# Altium PCB ATT-L6201.PcbDoc
Units mm, origin at the board's own origin, x right, y up, seen from the top; angles counter-clockwise.
Board outline 108.25 x 95.81 mm, 2 copper layers (Top Layer, Bottom Layer); 114 components, 179 nets, 450 pads, 0 vias.
Unrouted connection lines stored in the file: 267.
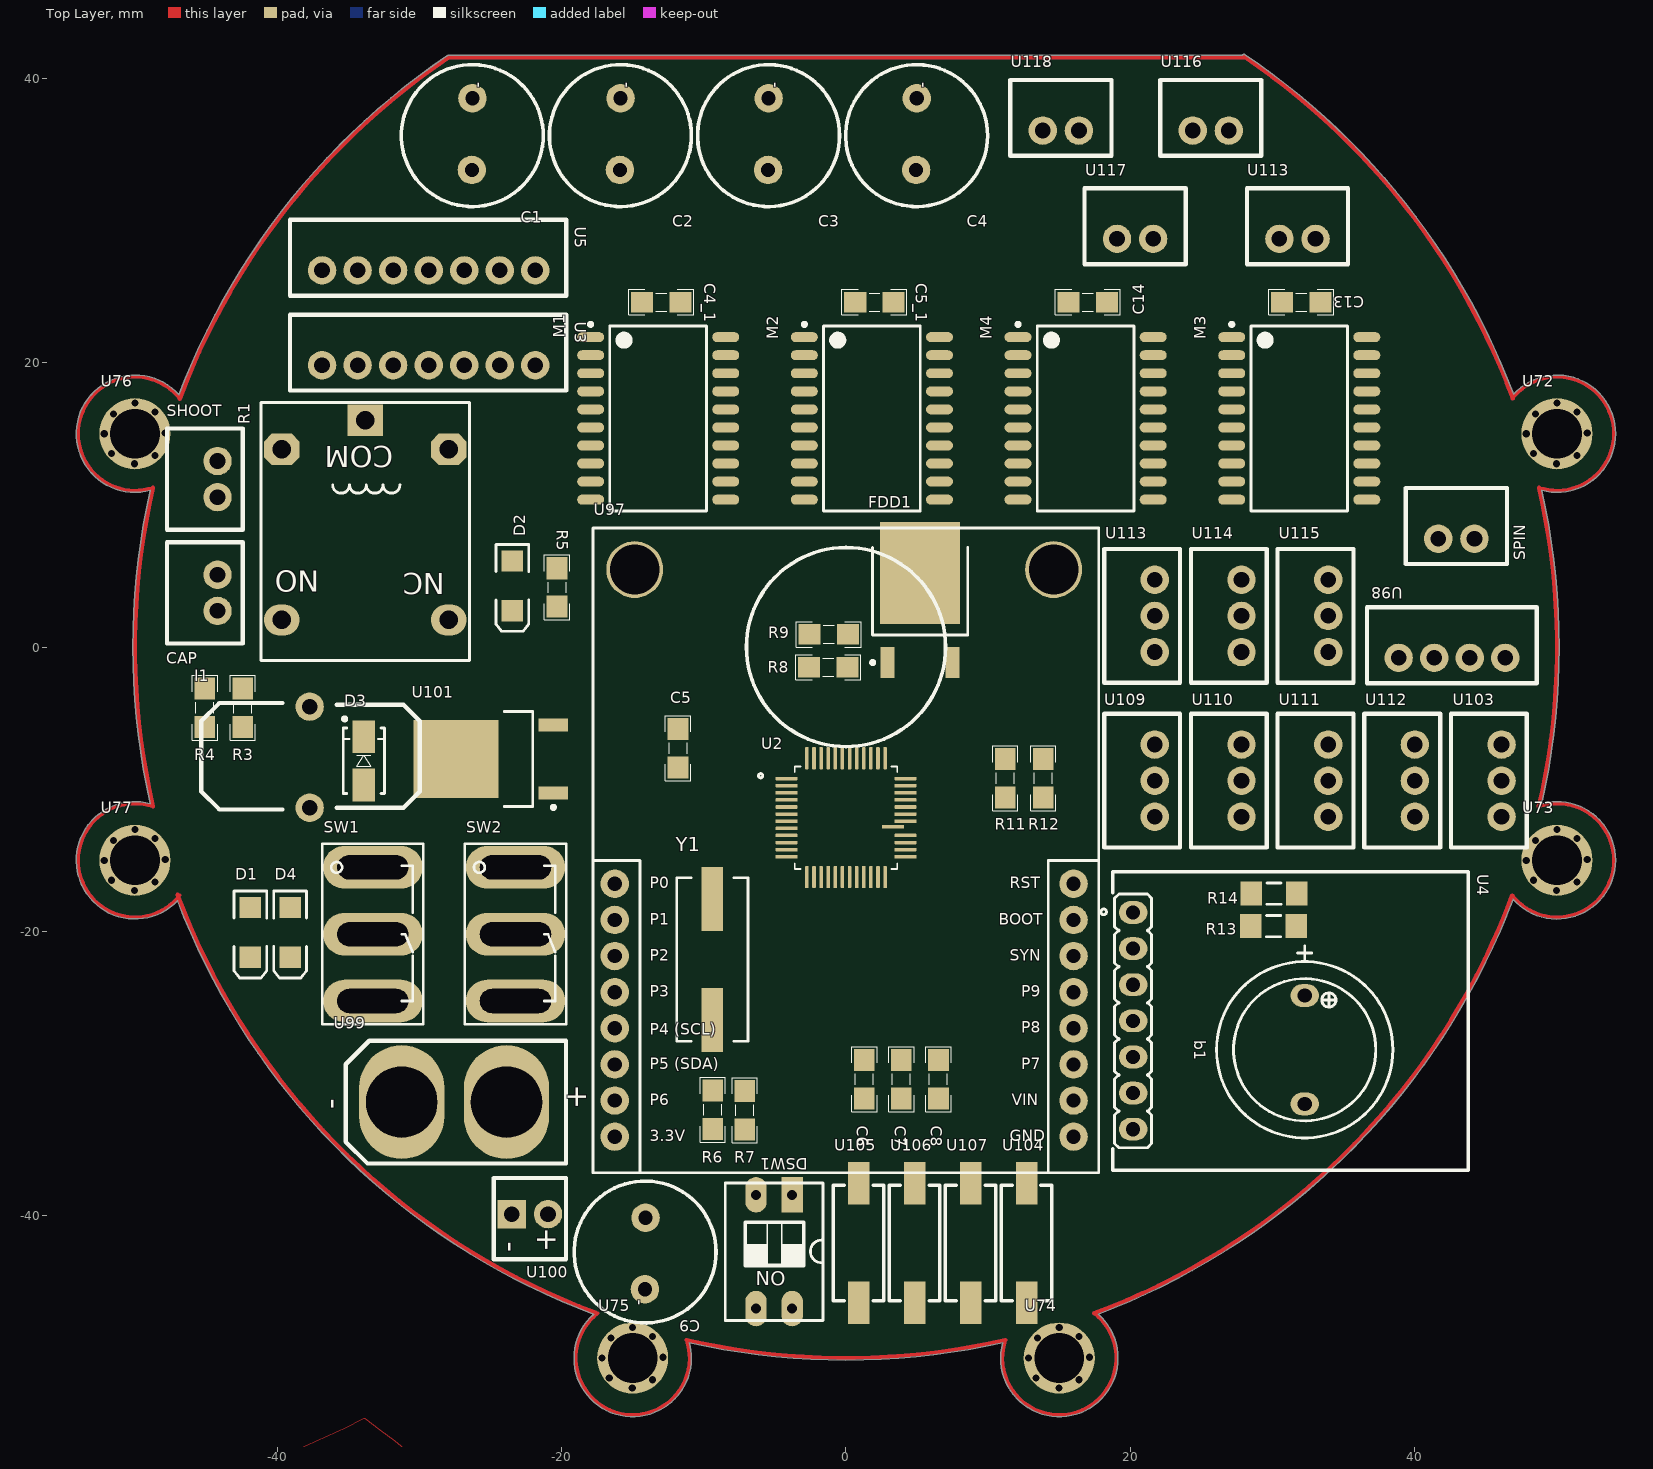
[diagram p0: Top Layer view]
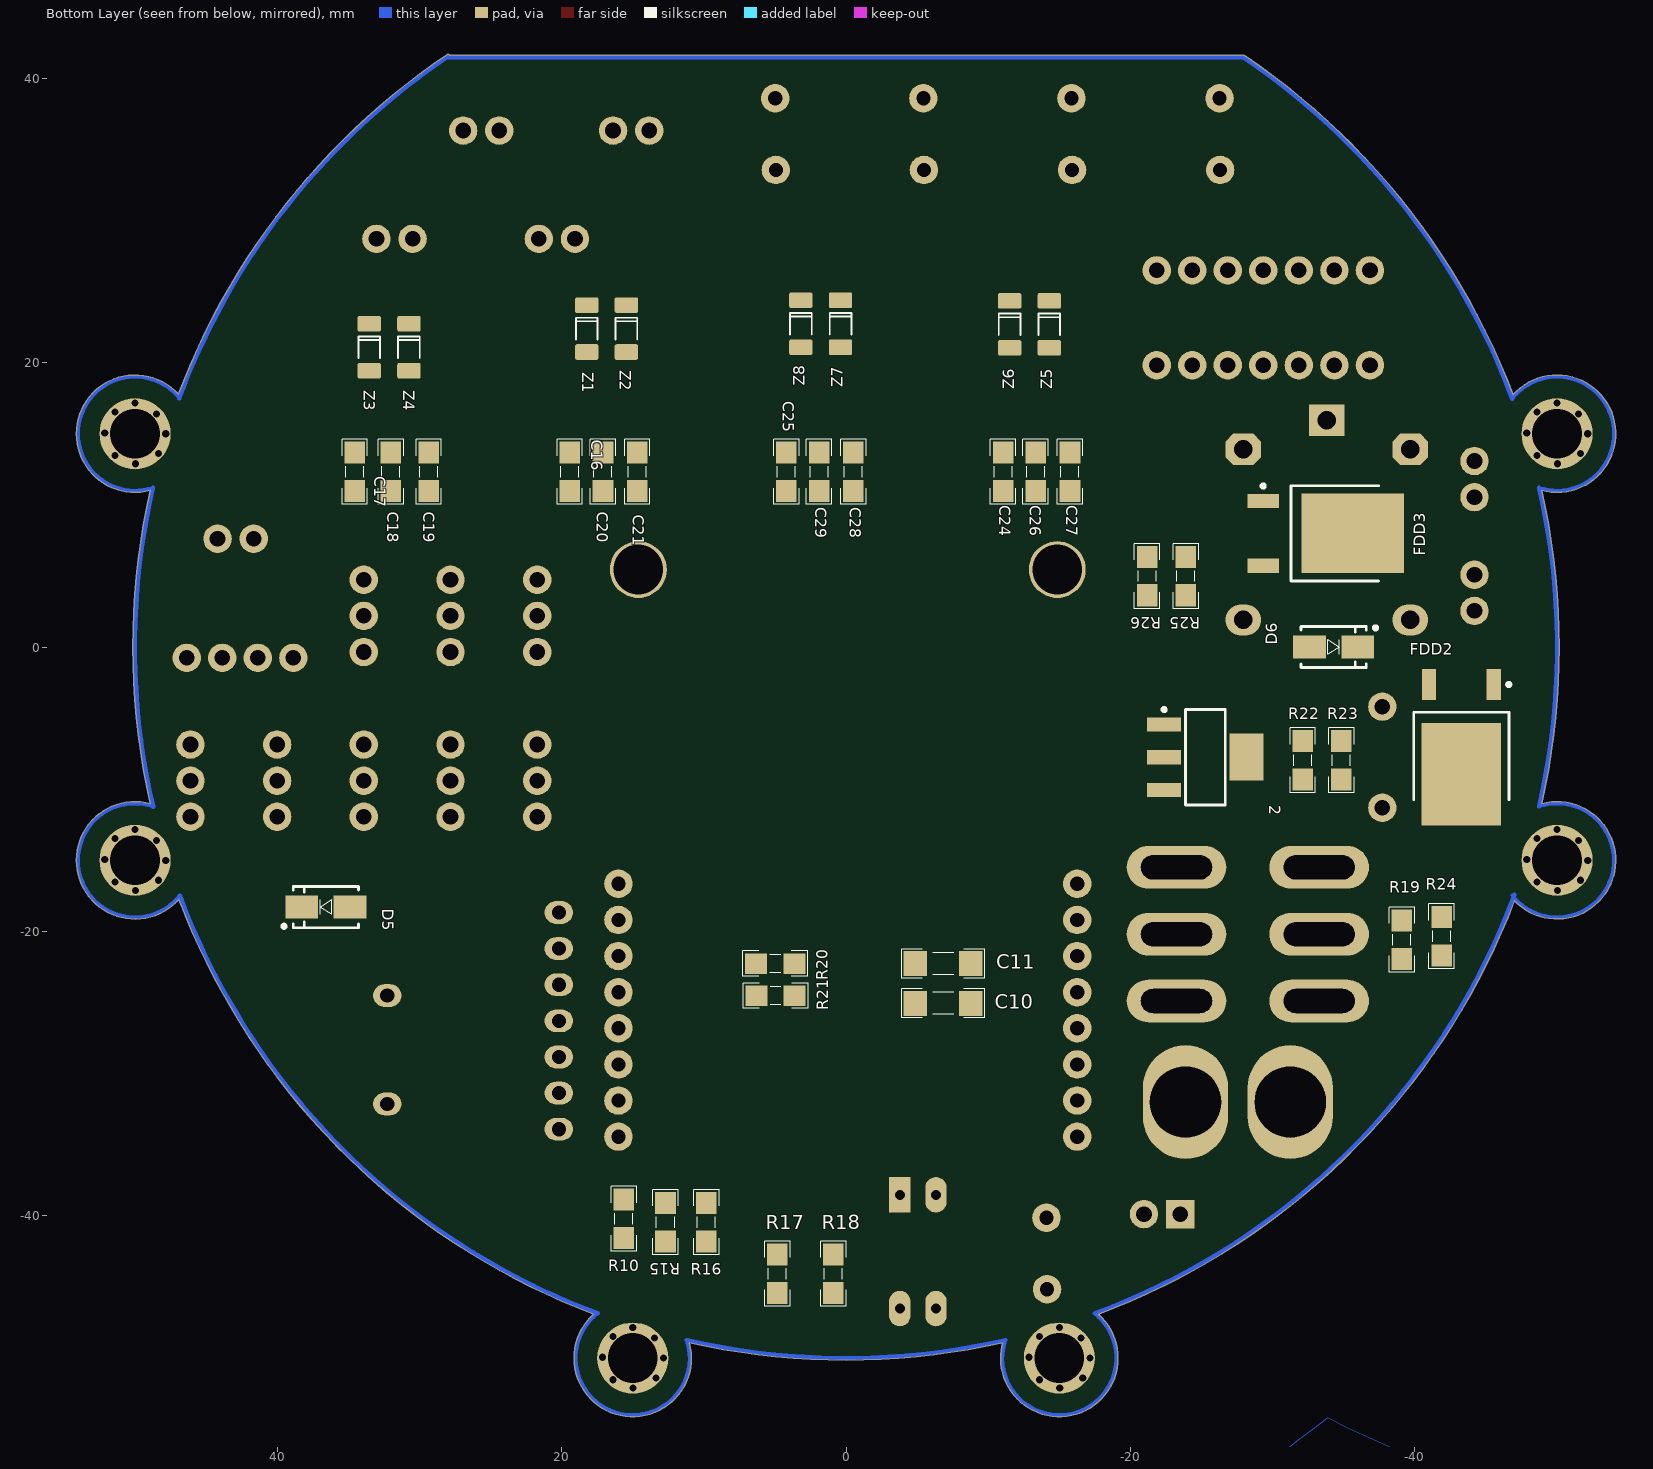
[diagram p1: Bottom Layer view, seen from below]

## Layer stack, top to bottom
Top Solder: solder mask 0.0102, Solder Resist, Dk 3.5
Top Layer: signal copper 0.0356
Dielectric 1: dielectric 0.32, FR-4, Dk 4.8
Bottom Layer: signal copper 0.0356
Bottom Solder: solder mask 0.0102, Solder Resist, Dk 3.5

## Board outline
-17.745,-46.918 cw(c-0.16,0.048) -47.01,-17.845 cw(c-50,-15) -48.926,-11.015 cw(c0,0) -48.926,11.015 cw(c-50,15) -46.91,17.736 cw(c0,0) -28.044,41.577 cw(c-27.96,41.452) -27.96,41.602 27.849,41.602 cw(c27.982,41.532) 28.067,41.657 cw(c0.023,0.08) 46.947,17.777 cw(c50,15) 54.127,15 cw(c50,15) 48.926,11.015 cw(c0,0) 50.15,0 cw(c0,0) 48.926,-11.015 cw(c50,-15) 54.127,-15 cw(c50,-15) 46.91,-17.736 cw(c0,0) 17.736,-46.91 cw(c15,-50) 19.127,-50 cw(c15,-50) 11.015,-48.926 cw(c0,0) -11.015,-48.926 cw(c-15,-50) -10.873,-50 cw(c-15,-50)

## Design rules (kind name [scope] priority, off if disabled: settings)
Clearance [All] p1: gap=1 ignorepadtopadclearanceinfootprint=FALSE except(0.25: Arc-Arc Arc-Track Arc-SMDPad Track-Track Track-SMDPad SMDPad-SMDPad; 0.254: Arc-THPad Arc-Via Arc-Text Arc-Hole Track-THPad Track-Via Track-Text Track-Hole SMDPad-THPad SMDPad-Via SMDPad-Text SMDPad-Hole THPad-THPad THPad-Via THPad-Text THPad-Hole Via-Via Via-Text Via-Hole Text-Text Text-Hole; 0.5: Fill-Text Fill-Hole Poly-Text Poly-Hole Region-Text Region-Hole)
ComponentClearance [All] p1 off: gap=0.254 collisioncheckmode=3 verticalgap=0.254 showdistances=FALSE
Height [All] p1 off: minheight=0 maxheight=25.4 prefheight=12.7
PolygonConnect [All] p1: connectstyle=Direct reliefconductorwidth=0.5 reliefentries=4 polygonreliefangle="90 Angle" airgapwidth=0.5
RoutingVias [All] p1: holewidth=0.3 width=0.6 viastyle="Through Hole" minholewidth=0.25 minwidth=0.25 maxholewidth=1 maxwidth=1
SolderMaskExpansion [All] p1: expansion=0.102 istentingtop=FALSE
Width [All] p1: maxlimit=10 minlimit=0.25 preferedwidth=0.8
28 further rules are at their usual default settings.

## Components (designator, comment, footprint, x,y, rotation, side; value= is the part's Value field where it differs from the comment)
2 "Comment" SOT223_N -25.273,-7.747 r180 bottom
b1 "Comment" "BUZZER 7.62mm DC" 32.258,-28.321 r270 top
C1 "Comment" "MY_CAP_POL 10MM" -26.289,36.068 r90 top
C2 "Comment" "MY_CAP_POL 10MM" -15.875,36.068 r90 top
C3 "Comment" "MY_CAP_POL 10MM" -5.461,36.068 r90 top
C4 "Comment" "MY_CAP_POL 10MM" 4.953,36.068 r90 top
C4_1 "Comment" CAPC3413X12N -13.001,24.257 r0 top
C5 "Comment" CAPC3413X12N -11.811,-7.112 r270 top
C5_1 "Comment" CAPC3413X12N 2.001,24.257 r0 top
C6 "Comment" CAPC3413X12N 1.295,-30.392 r90 top
C7 "Comment" CAPC3413X12N 3.899,-30.392 r90 top
C8 "Comment" CAPC3413X12N 6.502,-30.392 r90 top
C9 "Comment" "MY_CAP_POL 10MM" -14.117,-42.649 r270 top
C10 "0.1uF" CAPC4817X12N -6.833,-25.058 r0 bottom (schematic designator C12)
C11 "0.1uF" CAPC4817X12N -6.833,-22.264 r0 bottom
C13 "Comment" CAPC3413X12N 32.004,24.257 r0 top
C14 "Comment" CAPC3413X12N 17.002,24.257 r0 top
C16 "Comment" CAPC3413X12N 19.431,12.319 r90 bottom
C17 "Comment" CAPC3413X12N 34.544,12.319 r90 bottom
C18 "Comment" CAPC3413X12N 32.004,12.319 r270 bottom
C19 "Comment" CAPC3413X12N 29.337,12.319 r270 bottom
C20 "Comment" CAPC3413X12N 17.092,12.319 r270 bottom
C21 "Comment" CAPC3413X12N 14.679,12.319 r270 bottom
C24 "Comment" CAPC3413X12N -11.049,12.319 r90 bottom
C25 "Comment" CAPC3413X12N 4.191,12.319 r90 bottom
C26 "Comment" CAPC3413X12N -13.335,12.319 r270 bottom
C27 "Comment" CAPC3413X12N -15.748,12.319 r270 bottom
C28 "Comment" CAPC3413X12N -0.522,12.319 r270 bottom
C29 "Comment" CAPC3413X12N 1.891,12.319 r270 bottom
CAP "Comment" "XH 2pin" -45.085,3.81 r90 top
D1 "SMD 1206 LED" "LED 1206" -41.885,-20.066 r270 top (schematic designator D2)
D2 "SMD 1206 LED" "LED 1206" -23.46,4.306 r270 top
D3 "1n4007" DIOM4629X24N -33.909,-8.001 r90 top
D4 "SMD 1206 LED" "LED 1206" -39.091,-20.066 r270 top (schematic designator D2)
D5 "1n4007" DIOM4629X24N 36.576,-18.288 r0 bottom
D6 "1n4007" DIOM4629X24N -34.29,0 r180 bottom (schematic designator D3)
DSW1 "Comment" "DIP Switch x2" -3.785,-38.52 r180 top
FDD1 "Comment" TO252-3M 5.207,3.307 r90 top
FDD2 "Comment" TO252-3M -43.274,-7.042 r270 bottom
FDD3 "Comment" TO252-3M -33.737,7.995 r180 bottom
I1 "Comment" inductor -37.846,-7.747 r90 top
M1 "Comment" L6201 -13.208,16.077 r0 top
M2 "Comment" L6201 1.82,16.077 r0 top
M3 "Comment" L6201 31.877,16.077 r0 top
M4 "Comment" L6201 16.849,16.077 r0 top
R1 "Comment" "Relay 18.85x15.35x15.70" -33.807,8.929 r180 top
R3 "Comment" RESC3413X04N -42.418,-4.271 r270 top
R4 "Comment" RESC3413X04N -45.085,-4.271 r270 top
R5 "1K" RESC3413X04N -20.32,4.191 r270 top (schematic designator R22)
R6 "Comment" RESC3413X04N -9.373,-32.551 r270 top
R7 "Comment" RESC3413X04N -7.119,-32.574 r270 top
R8 "Comment" RESC3413X04N -1.245,-1.424 r180 top
R9 "Comment" RESC3413X04N -1.223,0.889 r180 top
R10 "Comment" RESC3413X04N 15.621,-40.212 r270 bottom
R11 "1K" RESC3413X04N 11.2,-9.23 r270 top (schematic designator R34)
R12 "1K" RESC3413X04N 13.868,-9.23 r270 top (schematic designator R35)
R13 "SMD" "Resistor SMD 1206" 30.074,-19.623 r0 top (schematic designator RES3)
R14 "SMD" "Resistor SMD 1206" 30.099,-17.337 r180 top (schematic designator RES2)
R15 "1K" RESC3413X04N 12.693,-40.448 r90 bottom (schematic designator R22)
R16 "Comment" RESC3413X04N 9.819,-40.448 r270 bottom
R17 "1K" RESC3413X04N 4.826,-44.069 r270 bottom (schematic designator R23)
R18 "1K" RESC3413X04N 0.889,-44.069 r270 bottom (schematic designator R23)
R19 "1K" RESC3413X04N -39.091,-20.574 r270 bottom (schematic designator R22)
R20 "Comment" RESC3413X04N 4.978,-22.264 r180 bottom
R21 "Comment" RESC3413X04N 4.956,-24.518 r180 bottom
R22 "Comment" RESC3413X04N -32.113,-7.972 r270 bottom
R23 "Comment" RESC3413X04N -34.838,-7.972 r270 bottom
R24 "1K" RESC3413X04N -41.885,-20.348 r270 bottom (schematic designator R22)
R25 "Comment" RESC3413X04N -23.901,4.992 r90 bottom
R26 "Comment" RESC3413X04N -21.176,4.992 r90 bottom
SHOOT "Comment" "XH 2pin" -45.085,11.811 r90 top
SPIN "Comment" "XH 2pin" 42.926,8.509 r0 top
SW1 "Comment" "Switch SPDT - 500x270x1100x185 mil" -33.274,-20.193 r0 top
SW2 "Comment" "Switch SPDT - 500x270x1100x185 mil" -23.241,-20.193 r0 top
U2 "STM32F103C8T6" QFP50P900X900X160-48N 0,-12 r0 top (schematic designator U5)
U3 "Comment" "XH 7PIN" -29.323,18.288 r0 top
U4 "TDAxis12" TDAxis12 20.268,-26.289 r270 top (schematic designator U2)
U5 "Comment" "XH 7PIN" -29.323,24.963 r0 top
U72 "Comment" SCREW 50,15 r0 top
U73 "Comment" SCREW 50,-15 r0 top
U74 "Comment" SCREW 15,-50 r0 top
U75 "Comment" SCREW -15,-50 r0 top
U76 "Comment" SCREW -50,15 r0 top
U77 "Comment" SCREW -50,-15 r0 top
U97 "Comment" OpenMV 0,-15 r0 top locked
U98 "Comment" "XH 4PIN" 42.615,0.127 r0 top
U99 "Comment" XT60 -26.035,-32.004 r270 top
U100 "Comment" "H2 MOLEX" -22.225,-40.259 r270 top
U101 "Comment" "7805 (SOT-252)" -24.982,-7.874 r180 top
U103 "Comment" "XH 3PIN" 45.212,-9.398 r90 top
U104 "Comment" pushbutton 12.7,-41.91 r90 top
U105 "Comment" pushbutton 0.889,-41.91 r90 top
U106 "Comment" pushbutton 4.826,-41.91 r90 top
U107 "Comment" pushbutton 8.763,-41.91 r90 top
U109 "Comment" "XH 3PIN" 20.828,-9.398 r90 top
U110 "Comment" "XH 3PIN" 26.924,-9.398 r90 top
U111 "Comment" "XH 3PIN" 33.02,-9.398 r90 top
U112 "Comment" "XH 3PIN" 39.116,-9.398 r90 top
U113 "Comment" "XH 2pin" 31.75,29.591 r0 top
U113 "Comment" "XH 3PIN" 20.828,2.189 r90 top
U114 "Comment" "XH 3PIN" 26.924,2.189 r90 top
U115 "Comment" "XH 3PIN" 33.02,2.189 r90 top
U116 "Comment" "XH 2pin" 25.654,37.211 r0 top
U117 "Comment" "XH 2pin" 20.329,29.591 r0 top
U118 "Comment" "XH 2pin" 15.113,37.211 r0 top
Y1 "12 MHz" "Crystal SMD" -9.398,-21.971 r90 top
Z1 "Comment" "SOD80, LL-34" 18.231,22.395 r270 bottom
Z2 "Comment" "SOD80, LL-34" 15.442,22.395 r270 bottom
Z3 "Comment" "SOD80, LL-34" 33.523,21.082 r270 bottom
Z4 "Comment" "SOD80, LL-34" 30.734,21.082 r270 bottom
Z5 "Comment" "SOD80, LL-34" -14.294,22.69 r270 bottom
Z6 "Comment" "SOD80, LL-34" -11.505,22.69 r270 bottom
Z7 "Comment" "SOD80, LL-34" 0.386,22.733 r270 bottom
Z8 "Comment" "SOD80, LL-34" 3.175,22.733 r270 bottom

## Footprints (in the part's own frame and the unit in brackets; to place one, negate y for a bottom-side part, rotate by r counter-clockwise, add the part's x,y. Pads: shape width x height; smd on the part's side, far side on the other; paste and mask are expansions set on the pad)
"7805 (SOT-252)" [mm] "D-PAK, 3-Pads, Body 6.25x6.71mm (max), IPC Medium Density"
  rect 2.1x0.9 smd: 1(-4.4,2.4) 3(-4.4,-2.4)
  rect 6x5.5 smd: 4(2.45,0)
  silkscreen extent -4.52,-3.35 -0.95,3.52, body extent -5.06,-3.35 4.85,3.35, height 2.45
"BUZZER 7.62mm DC" [mm] "BUZZER 12mm DIA , 7.62mm pitch DESIGNER ABBAS BASEREH"
  oval 1.6x2 hole 1: 1(-3.81,0) 2(3.81,0)
  silkscreen extent -7.3,-6.2 6.2,6.2, body extent -6,-6 6,6, height 9.5
CAPC3413X12N [mm] "Chip Capacitor, 2-Leads, Body 3/40x1/30mm, IPC Medium Density-Design:Abbas Basereh"
  rect 1.55x1.45 smd: 1(-1.35,0) 2(1.35,0)
  silkscreen extent -2.29,-0.89 2.29,0.89, body extent -1,-0.62 1,0.63, height 0.78
CAPC4817X12N [mm] "Chip Capacitor, 2-Leads, Body 4/80x1/70mm, IPC Medium Density-Design:Abbas Basereh"
  rect 1.65x1.75 smd: 1(-1.95,0) 2(1.95,0)
  silkscreen extent -2.92,-1.02 2.92,1.02, body extent -1.6,-0.8 1.6,0.8, height 1
"Crystal SMD" [mm] "DESIGNER ABBAS BASEREH"
  rect 4.5x1.5 smd: 1(-4.25,0) 2(4.25,0)
  silkscreen extent -5.75,-2.5 5.75,2.5, body extent -6.21,-2.25 6.09,2.25, height 5.18
DIOM4629X24N [mm] "Molded Diode, 2-Leads, Body 4/60x2/90mm, IPC Medium Density-Design:Abbas Basereh"
  rect 2.3x1.6 smd: 1(-1.7,0) 2(1.7,0)
  silkscreen extent -2.3,-1.45 3.07,1.47, body extent -2.5,-1.22 2.5,1.48, height 2.2
"DIP Switch x2" [mm] "Switch DIP 2 way flat slide Thru-Hole-Design:Ali Hafizi"
  rect 1.5x2.5 hole 0.7: 1(0,0)
  oval 1.5x2.5 hole 0.7: 2(2.54,0) 3(2.54,8) 4(0,8)
  silkscreen extent -2.16,-0.82 4.71,8.83, body extent -1.98,-1.03 4.52,8.97, height 6.91
"H2 MOLEX" [mm]
  round 2 hole 1.1: 1(-0.381,1.27)
  rect 2x2 hole 1.1: 2(-0.381,-1.27)
  silkscreen extent -2.92,-2.54 2.79,2.54, body extent -2.9,-2.54 2.9,2.54, height 11.24
inductor [mm]
  round 2 hole 1.1: 1(-3.556,-0.127) 2(3.556,-0.127)
  silkscreen extent -3.68,-7.87 3.81,7.49, body extent -4.15,-8.42 4.15,8.17, height 16.29
L6201 [mm] "SOP, 20-Leads, Body 12.80x7.50mm, Pitch 1.27mm, IPC Medium Density"
  oval 1.9x0.7 smd: 1(-4.75,5.715) 2(-4.75,4.445) 3(-4.75,3.175) 4(-4.75,1.905) 5(-4.75,0.635) 6(-4.75,-0.635) 7(-4.75,-1.905) 8(-4.75,-3.175) 9(-4.75,-4.445) 10(-4.75,-5.715) 11(4.75,-5.715) 12(4.75,-4.445) 13(4.75,-3.175) 14(4.75,-1.905) 15(4.75,-0.635) 16(4.75,0.635) 17(4.75,1.905) 18(4.75,3.175) 19(4.75,4.445) 20(4.75,5.715)
  silkscreen extent -4.87,-6.5 3.4,6.74, body extent -5.16,-6.5 5.16,6.5, height 2.5
"LED 1206" [mm]
  rect 1.5x1.5 smd: 1(-1.75,0) 2(1.75,0)
  silkscreen extent -2.9,-1.15 3.2,1.15, body extent -1.65,-0.72 1.65,0.73, height 1.36
"MY_CAP_POL 10MM" [mm]
  round 2 hole 1: +(-2.517,0.02) -(2.517,-0.02)
  silkscreen extent -5.09,-5 4.89,4.97, body extent -5.13,-5.07 5.03,5.09, height 10.16
OpenMV [mm]
  round 2 hole 1: 1(-16.256,-19.431) 2(-16.256,-16.891) 3(-16.256,-14.351) 4(-16.256,-11.811) 5(-16.256,-9.271) 6(-16.256,-6.731) 7(-16.256,-4.191) 8(-16.256,-1.651) 9(16.002,-19.431) 10(16.002,-16.891) 11(16.002,-14.351) 12(16.002,-11.811) 13(16.002,-9.271) 14(16.002,-6.731) 15(16.002,-4.191) 16(16.002,-1.651)
  round 4 hole 3.5: 17(14.605,20.447) 18(-14.859,20.447)
  silkscreen extent -17.78,-21.97 17.78,23.37, body extent -17.92,-22.12 17.9,23.58, height 38.95
pushbutton [mm]
  rect 3x1.5 smd: 1(-4.191,0) 2(4.191,0)
  silkscreen extent -4.06,-1.78 4.06,1.78, body extent -4.17,-1.82 4.17,1.82, height 4.25
QFP50P900X900X160-48N [mm]
  rrect50% 1.56x0.25 smd: 1(-4.18,2.75) 2(-4.18,2.25) 3(-4.18,1.75) 4(-4.18,1.25) 5(-4.18,0.75) 6(-4.18,0.25) 7(-4.18,-0.25) 8(-4.18,-0.75) 9(-4.18,-1.25) 10(-4.18,-1.75) 11(-4.18,-2.25) 12(-4.18,-2.75) 25(4.18,-2.75) 26(4.18,-2.25) 27(4.18,-1.75) 28(4.18,-1.25) 29(3.302,-0.635) 30(4.18,-0.25) 31(4.18,0.25) 32(4.18,0.75) 33(4.18,1.25) 34(4.18,1.75) 35(4.18,2.25) 36(4.18,2.75)
  rrect50% 0.25x1.56 smd: 13(-2.75,-4.18) 14(-2.25,-4.18) 15(-1.75,-4.18) 16(-1.25,-4.18) 17(-0.75,-4.18) 18(-0.25,-4.18) 19(0.25,-4.18) 20(0.75,-4.18) 21(1.25,-4.18) 22(1.75,-4.18) 23(2.25,-4.18) 24(2.75,-4.18) 37(2.75,4.18) 38(2.25,4.18) 39(1.75,4.18) 40(1.25,4.18) 41(0.75,4.18) 42(0.25,4.18) 43(-0.25,4.18) 44(-0.75,4.18) 45(-1.25,4.18) 46(-1.75,4.18) 47(-2.25,4.18) 48(-2.75,4.18)
  silkscreen extent -6.15,-3.6 3.6,3.6
"Relay 18.85x15.35x15.70" [mm]
  rect 2.5x2.2 hole 1.3: 1(0,-7.025)
  oval 2.5x2.2 hole 1.3: 2(-5.875,7.025) 3(5.875,7.025)
  oct 2.5x2.2 hole 1.3: 4(-5.875,-4.975) 5(5.875,-4.975)
  silkscreen extent -7.33,-8.27 7.33,9.88, body extent -7.37,-8.72 7.63,9.98, height 15.7
RESC3413X04N [mm] "Chip Resistor, 2-Leads, Body 3/40x1/30mm, IPC Medium Density-Design:Abbas Basereh"
  rect 1.55x1.45 smd: 1(-1.35,0) 2(1.35,0)
  silkscreen extent -2.29,-0.89 2.29,0.89, body extent -1.25,-0.62 1.25,0.62, height 0.79
"Resistor SMD 1206" [mm]
  rect 1.5x1.7 smd: 1(-1.6,0) 2(1.6,0)
  silkscreen extent -0.5,-0.75 0.5,0.75, body extent -1.6,-0.8 1.6,0.8, height 0.55
SCREW [mm]
  round 5 hole 3.5: 1(0,0)
  round 0 hole 0.5: ""(-2.159,0) ""(-1.651,-1.397) ""(-1.524,1.397) ""(-0.031,-2.11) ""(0,2.159) ""(1.397,-1.524) ""(1.397,1.524) ""(2.128,0.059)
"SOD80, LL-34" [mm] "Diode, MiniMELF"
  round 0.5 on Mech15: 0(0,0)
  rrect25% 1.1x1.65 smd: 1(1.65,0) 2(-1.65,0)
  silkscreen extent -0.76,-0.76 0.76,0.76, body extent -1.88,-0.8 1.82,0.8, height 1.6
SOT223_N [mm] "SOT223, 4-Leads, Body 6.5x3.5mm, Pitch 2.3mm, Lead Span 7mm, IPC Medium Density"
  rect 2.4x1 smd: 1(-2.9,2.3) 2(-2.9,0) 3(-2.9,-2.3)
  rect 2.4x3.3 smd: 4(2.9,0)
  silkscreen extent -3.03,-3.35 1.4,3.47, body extent -1.85,-3.35 1.85,3.35, height 1.7
"Switch SPDT - 500x270x1100x185 mil" [mm]
  oval 7x3 hole 1.7 slot 5 at 0 deg: 1(0,-4.699) 2(0,0) 3(0,4.699)
  silkscreen extent -3.56,-6.35 3.56,6.35, body extent -3.42,-6.35 3.44,6.35, height 28.62
TDAxis12 [mm] "Connector; Header; 7 Position"
  oval 1.6x2 hole 1 mask+0.1: 1(-7.62,-0.075) 2(-5.08,-0.075) 3(-2.54,-0.075) 4(0,-0.075) 5(2.54,-0.075) 6(5.08,-0.075) 7(7.62,-0.075)
  silkscreen extent -10.5,-2.35 10.5,23.5, body extent -10.5,-1.5 10.5,23.5, height 11.39
TO252-3M [mm] "D-PAK, 3-Pads, Body 6.2x6.7mm (max), IPC Low Density"
  rect 2.2x1 smd: 1(-4.4,2.28) 3(-4.4,-2.28)
  rect 7.2x5.6 smd: 4(1.9,0)
  silkscreen extent -4.52,-3.35 3.7,3.45, body extent -5.06,-3.27 4.88,3.27, height 2.39
"XH 2pin" [mm]
  round 2 hole 1.1: 1(-1.27,-0.889) 2(1.27,-0.889)
  silkscreen extent -3.56,-2.67 3.56,2.67, body extent -3.7,-2.88 3.7,2.88, height 7
"XH 3PIN" [mm]
  round 2 hole 1.1: 1(-2.54,-0.889) 2(0,-0.889) 3(2.54,-0.889)
  silkscreen extent -4.7,-2.67 4.7,2.67, body extent -4.95,-2.88 4.95,2.88, height 7
"XH 4PIN" [mm]
  round 2 hole 1.1: 1(-3.753,-0.889) 2(-1.253,-0.889) 3(1.247,-0.889) 4(3.747,-0.889)
  silkscreen extent -5.97,-2.67 5.97,2.67, body extent -6.2,-2.88 6.2,2.88, height 7
"XH 7PIN" [mm]
  round 2 hole 1.1: 1(-7.523,1.524) 2(-5.023,1.524) 3(-2.523,1.524) 4(-0.023,1.524) 5(2.477,1.524) 6(4.977,1.524) 7(7.477,1.524)
  silkscreen extent -9.78,-0.25 9.65,5.08, body extent -9.95,-0.46 9.95,5.29, height 7
XT60 [mm]
  oval 8x6 hole 5: 1(0,2.159) 2(0,-5.207)
  silkscreen extent -4.32,-9.14 4.32,6.35, body extent -3.75,-9.72 3.75,6.83, height 16

## Part data
C10 C11: library part "CAP SMD 1206", "CAP 1206", Data=16-12-2016, Desc.="CAP SMD 1206", Designer="Abbas Basereh"
D1 D2 D4: library part "LED SMD 1206"
D3 D5 D6: library part "1n4007 SMD M7", "Standard Rectifiers", Manufacturer="DC COMPONENTS", Data=16-12-2016, Designer="Abbas Basereh", Link=http://www.tme.eu/en/details/m7/smd-universal-diodes/dc-components/, Part. No=M7
R5 R11 R12 R15 R17 R18 R19 R24: library part "RES 0805 0.125W", "RES 0805", Data=16-12-2016, Desc.="RES SMD 0805", Designer="Abbas Basereh"
R13 R14: library part "Res SMD"
U2: "Mainstream Performance line, ARM Cortex-M3 MCU with 64 Kbytes Flash, 72 MHz CPU, motor control, USB and CAN", Package=None, Availability=Unavailable, MP=STM32F103C8T6, Price=None
U4: "Module, 12 Axis IMU, I2C UART Output"
Y1: library part XTAL, "XTAL Crystal", ComponentLink1Description=Datasheet, ComponentLink2Description=Reference, Design Date=2017-1-3, Designer="ABBAS BASEREH", Mounting Technology="Surface Mount\Through-Hole", Status=Unreleased

## Nets (pads, with @x,y where several pads share a name; then routed paths per layer and width w, separated by ;. In a path a pad name is that pad's centre, name@x,y a point inside that pad or via, vN(x,y) a via of type N, cw(c..) or ccw(c..) an arc to the next point about the centre after c; other vN are vias at no path point)
3.3V: 
5V: 2.3 C5.2 R1.4 U97.10 U101.3
12V: SW2.3 U101.1
+3.3V: 
+5: 
A: 
ADC0: U2.10 U112.1
ADC1: U2.11 U111.1
ADC2: U2.12 U110.1
ADC3: U2.13 U109.1
ADC4: U2.14 U115.1
ADC5: U2.15 U114.1
ADC6: U2.16 U113.1@21.717,-0.351
ADC7: U2.17
ADC8: U2.18 U103.1
ADC9: R22.1 R23.1 U2.19
ADC10: 
ADC11: 
ADC12: 
ADC13: 
ADC14: 
ADC15: 
ADCOUT: 
ADD0: 
ADD1: U3.2
ADD2: U3.3
ADD3: U3.4
ADD4: U3.5
"AIR MIX MA +": 
"AIR MIX MA -": 
B: 
b11: C26.1 M1.12
b12: C29.1 M2.12
b13: C20.1 M4.12
b14: C18.1 M3.12
b21: C27.1 M1.19
b22: C28.1 M2.19
b23: C21.1 M4.19
b24: C19.1 M3.19
BAT_Volt: 
BOOST_CTRL: R4.1 U2.46
BOOT0: R17.2 U2.44 U106.1
buz: b1.1 R10.2
Buzzer: R10.1 U2.39
DIP1: DSW1.4 R7.2 U2.40
DIP2: DSW1.3 R6.2 U2.41
DIPSW1: 
DIPSW2: 
ENA_1: 
ENA_2: 
ENA_3: 
ENA_4: 
ENB_1: 
ENB_2: 
ENB_3: 
ENB_4: 
GATE: FDD1.1 R8.1 R9.1
GATE_BOOST: FDD2.1 R3.2 R4.2
GATE_RELAY: FDD3.1 R25.2 R26.2
GND: 2.1 b1.2 C1.- C2.- C3.- C4.- C5.1 C6.1 C7.1 C8.1 C9.- C10.2 C11.2 C16.1 C17.1 C24.1 C25.1 CAP.1 FDD1.3 FDD2.3 FDD3.3 M1.1 M1.4 M1.5 M1.6 M1.7 M1.14 M1.15 M1.16 M1.17 M2.1 M2.4 M2.5 M2.6 M2.7 M2.14 M2.15 M2.16 M2.17 M3.1 M3.4 M3.5 M3.6 M3.7 M3.14 M3.15 M3.16 M3.17 M4.1 M4.4 M4.5 M4.6 M4.7 M4.14 M4.15 M4.16 M4.17 R3.1 R5.1 R6.1 R7.1 R8.2 R13.1 R15.1 R16.2 R17.1 R19.1 R21.2 R22.2 R24.1 R26.1 SHOOT.1 U2.8 U2.23 U2.35 U2.47 U3.7 U4.2 U97.9 U98.1 U99.2 U100.2 U101.4 U103.3 U105.2 U109.3 U110.3 U111.3 U112.3 U113.3 U114.3 U115.3 Z1.1 Z2.1 Z3.1 Z4.1 Z5.1 Z6.1 Z7.1 Z8.1
I2C_SCL: 
I2C_SDA: 
ID: R20.1 R21.1 U2.33
INA1: M1.13 U2.28
INA2: M2.13 U2.27
INA3: M4.13 U2.26
INA4: M3.13 U2.25
INA_1: 
INA_2: 
INA_3: 
INA_4: 
INB1: 
INB2: 
INB3: 
INB4: 
INB_1: 
INB_2: 
INB_3: 
INB_4: 
Inductor: D6.1 FDD2.4 I1.1
IO: U2.45
LED1: D1.2 R24.2
LED2: D4.2 R19.2
LED3: D2.1 U2.2
LED3_RES: D2.2 R5.2
LED4: 
LED5: 
M1: FDD1.4 SPIN.2
MA1: 
MA2: 
MA3: 
MA4: 
MB1: 
MB2: 
MB3: 
MB4: 
"MODE MA +": 
"MODE MA -": 
MOTOR: 
MOTORS_EN: 
NET1: R13.2 R14.1 U4.7
NetD5_1: D5.1 U98.4
NewNet: 
NRST: R18.2 U2.7 U105.1
OSC_IN: C11.1 U2.5 Y1.2
OSC_OUT: C10.1 U2.6 Y1.1
OUT: U3.1
OUT_1A: C5_1.1 C26.2 M1.11 U117.1 Z7.2
OUT_1B: C5_1.2 C27.2 M1.9 U117.2 Z8.2
OUT_2A: C4_1.1 C29.2 M2.11 U118.1 Z5.2
OUT_2B: C4_1.2 C28.2 M2.9 U118.2 Z6.2
OUT_3A: C14.1 C20.2 M4.11 U116.1 Z2.2
OUT_3B: C14.2 C21.2 M4.9 U116.2 Z1.2
OUT_4A: C13.1 C18.2 M3.11 U113.1@30.48,28.702 Z4.2
OUT_4B: C13.2 C19.2 M3.9 U113.2@33.02,28.702 Z3.2
PWM1: M1.18 U2.43
PWM2: M2.18
PWM3: M4.18 U2.42
PWM4: M3.18 U2.29
PWM_1: 
PWM_2: 
PWM_3: 
PWM_4: 
RELAY: FDD3.4 R1.5
RELAY_CTRL: 
RES1: 
RES2: 
RES3: 
RES4: 
RES5: 
RX: U2.31
RX2: 
S3: 
S4: 
S5: 
S6: 
S7: 
S8: 
S9: 
S10: 
S11: 
S12: 
S13: 
S14: 
S15: 
SCL: R11.1 U2.21 U4.5 U97.4
SDA: R12.1 U2.22 U4.6 U97.3
SHIFT5: 
shoot: R25.1 U2.4
spin: R9.2 U2.3
SW1: R16.1 U2.38 U107.2
SW2: R15.2 U2.32 U104.2
SW3: 
SW4: 
SW5: 
SWCLK: U2.37 U98.2
SWDIO: U2.34 U98.3
SWR1: 
SWR2: 
SWR3: 
SWR4: 
SWR5: 
TX: U2.30
TX2: 
UART1_RX: 
UART1_TX: 
UART2_RX: 
UART2_TX: 
VBat: D3.1 U99.1 U100.1
VBOOST: CAP.2 D6.2 R1.3
VCC: 2.2 2.4 C6.2 C7.2 C8.2 C9.+ D4.1 D5.2 DSW1.1 DSW1.2 M1.2 M2.2 M3.2 M4.2 R11.2 R12.2 R14.2 R18.1 R20.2 U2.9 U2.24 U2.36 U2.48 U3.6 U4.1 U103.2 U104.1 U106.2 U107.1 U109.2 U110.2 U111.2 U112.2 U113.2@21.717,2.189 U114.2 U115.2
VIN: D3.2 SW1.2 SW2.2
VP: 
VREF1: C24.2 M1.20
VREF2: C25.2 M2.20
VREF3: C16.2 M4.20
VREF4: C17.2 M3.20
VSHOOT: R1.1 SHOOT.2
VSS: C1.+ C2.+ C3.+ C4.+ D1.1 I1.2 M1.10 M2.10 M3.10 M4.10 R23.2 SPIN.1 SW1.3
pads on no net: M1.3 M1.8 M2.3 M2.8 M3.3 M3.8 M4.3 M4.8 R1.2 SW1.1 SW2.1 U2.1 U2.20 U4.3 U4.4 U5.1 U5.2 U5.3 U5.4 U5.5 U5.6 U5.7 U72. U72.1 U73. U73.1 U74. U74.1 U75. U75.1 U76. U76.1 U77. U77.1 U97.1 U97.2 U97.5 U97.6 U97.7 U97.8 U97.11 U97.12 U97.13 U97.14 U97.15 U97.16 U97.17 U97.18 Z1.0 Z2.0 Z3.0 Z4.0 Z5.0 Z6.0 Z7.0 Z8.0
copper on no net: | length 804.8
  Top Layer w0.254: -48.728,-11.208 ccw(c-50,-15) -46.85,-17.466 ; -48.728,11.208 cw(c-50,15) -46.85,17.466 ; -17.466,-46.85 ccw(c-15,-50) -11.208,-48.728 ; 11.208,-48.728 ccw(c15,-50) 17.466,-46.85 ; 46.85,-17.466 ccw(c50,-15) 48.728,-11.208 ; 46.85,17.466 cw(c50,15) 48.728,11.208
  Top Layer w0.3: -48.728,-11.208 cw(c0,0) -48.728,11.208 ; -47.011,-17.418 ccw(c-0.16,0.048) -17.626,-46.802 ; -46.85,17.466 cw(c0,0) -27.96,41.452 27.96,41.452 ; -11.215,-48.726 ccw(c0,0) 11.208,-48.728 ; 17.466,-46.85 ccw(c0,0) 46.85,-17.466 ; 27.982,41.532 cw(c0.023,0.08) 46.897,17.483 ; 48.722,-11.234 ccw(c0,0) 48.728,11.208
  Bottom Layer w0.254: -55.347,-291.123 -55.347,-290.615 ; -53.823,-291.377 -55.347,-290.869 ; -53.823,-290.361 -55.347,-290.869 ; -48.728,-11.208 ccw(c-50,-15) -46.85,-17.466 ; -48.728,11.208 cw(c-50,15) -46.85,17.466 ; -33.208,-290.869 -55.347,-290.869 ; -17.466,-46.85 ccw(c-15,-50) -11.208,-48.728 ; -17.414,-290.869 4.724,-290.869 ; 3.2,-291.377 4.724,-290.869 ; 3.2,-290.361 4.724,-290.869 ; 4.724,-291.123 4.724,-290.615 ; 11.208,-48.728 ccw(c15,-50) 17.466,-46.85 ; 46.85,-17.466 ccw(c50,-15) 48.728,-11.208 ; 46.85,17.466 cw(c50,15) 48.728,11.208
  Bottom Layer w0.3: -48.728,-11.208 cw(c0,0) -48.728,11.208 ; -47.011,-17.418 ccw(c-0.16,0.048) -17.626,-46.802 ; -46.85,17.466 cw(c0,0) -27.96,41.452 27.96,41.452 ; -11.215,-48.726 ccw(c0,0) 11.208,-48.728 ; 17.466,-46.85 ccw(c0,0) 46.85,-17.466 ; 27.982,41.532 cw(c0.023,0.08) 46.897,17.483 ; 48.722,-11.234 ccw(c0,0) 48.728,11.208

## Polygon pours and split planes (outlines as drawn)
GND on Top Layer "NONET_L01_P002" (solid, shelved, pour order 2): -117.08,-152.197 cw(c-69.444,-103.671) -131.72,-130.978 -131.775,-130.926 -135.204,-130.926 -135.23,-130.934 -135.23,-120.943 -127.965,-120.943 -127.962,-120.959 cw(c-69.418,-103.824) -127.708,-85.842 -127.737,-85.815 -135.306,-85.815 -135.306,-76.824 -135.331,-76.773 -124.409,-76.773 -124.286,-76.732 cw(c-69.52,-103.595) -105.451,-54.301 -105.441,-54.28 ccw(c-69.715,17.002) -33.911,-54.24 -33.85,-54.252 cw(c-69.469,-103.773) -15.167,-75.982 -15.113,-75.985 -3.708,-75.985 -3.708,-86.018 -3.759,-86.044 -11.074,-86.044 -11.071,-86.155 cw(c-69.494,-103.697) -11.035,-121.118 -11.05,-121.139 -3.786,-121.122 -3.81,-121.121 -3.81,-131.078 -7.239,-131.078 -7.214,-131.084 cw(c-69.444,-103.671) -22.228,-152.607 -22.301,-152.693 -29.553,-145.442 -29.552,-145.442 cw(c-69.63,-103.725) -44.097,-155.635 -44.145,-155.645 -44.145,-168.949 -44.241,-168.977 cw(c-69.444,-103.671) -94.814,-168.912 -94.818,-168.899 -94.869,-155.721 -94.963,-155.682 cw(c-69.418,-103.671) -110.009,-145.023 -110.033,-145.124
GND on Bottom Layer "NONET_L02_P003" (solid, shelved, pour order 3): -117.08,-152.197 cw(c-69.444,-103.671) -131.72,-130.978 -131.775,-130.926 -135.204,-130.926 -135.23,-130.934 -135.23,-120.943 -127.965,-120.943 -127.962,-120.959 cw(c-69.418,-103.824) -127.708,-85.842 -127.737,-85.815 -135.306,-85.815 -135.306,-76.824 -135.331,-76.773 -124.409,-76.773 -124.286,-76.732 cw(c-69.52,-103.595) -105.451,-54.301 -105.441,-54.28 ccw(c-69.715,17.002) -33.911,-54.24 -33.85,-54.252 cw(c-69.469,-103.773) -15.167,-75.982 -15.113,-75.985 -3.708,-75.985 -3.708,-86.018 -3.759,-86.044 -11.074,-86.044 -11.071,-86.155 cw(c-69.494,-103.697) -11.035,-121.118 -11.05,-121.139 -3.786,-121.122 -3.81,-121.121 -3.81,-131.078 -7.239,-131.078 -7.214,-131.084 cw(c-69.444,-103.671) -22.228,-152.607 -22.301,-152.693 -29.553,-145.442 -29.552,-145.442 cw(c-69.63,-103.725) -44.097,-155.635 -44.145,-155.645 -44.145,-168.949 -44.241,-168.977 cw(c-69.444,-103.671) -94.814,-168.912 -94.818,-168.899 -94.869,-155.721 -94.963,-155.682 cw(c-69.418,-103.671) -110.009,-145.023 -110.033,-145.124

## Other copper
Bottom Layer:
  text "60.071 (mm)" at -32.954,-291.784 h1.52

## Silkscreen, mask and mechanical layers (free items; w line width, h text height)
Mechanical 1:
  lines w0.254: -48.728,-11.208 ccw(c-50,-15) -46.85,-17.466 ; -48.728,11.208 cw(c-50,15) -46.85,17.466 ; -17.466,-46.85 ccw(c-15,-50) -11.208,-48.728 ; 11.208,-48.728 ccw(c15,-50) 17.466,-46.85 ; 46.85,-17.466 ccw(c50,-15) 48.728,-11.208 ; 46.85,17.466 cw(c50,15) 48.728,11.208
  lines w0.3: -48.728,-11.208 cw(c0,0) -48.728,11.208 ; -47.011,-17.418 ccw(c-0.16,0.048) -17.626,-46.802 ; -46.85,17.466 cw(c0,0) -27.96,41.452 27.96,41.452 ; -11.215,-48.726 ccw(c0,0) 11.208,-48.728 ; 17.466,-46.85 ccw(c0,0) 46.85,-17.466 ; 27.982,41.532 cw(c0.023,0.08) 46.897,17.483 ; 48.722,-11.234 ccw(c0,0) 48.728,11.208

## Text inside footprints (layer, text, board x,y; h text height)
C1: Top Overlay "-" at -25.536,39.315 h0.8 r90
C2: Top Overlay "-" at -15.122,39.315 h0.8 r90
C3: Top Overlay "-" at -4.708,39.315 h0.8 r90
C4: Top Overlay "-" at 5.706,39.315 h0.8 r90
C9: Top Overlay "-" at -14.871,-45.896 h0.8 r270
DSW1: Top Overlay "ON" at -4.225,-43.88 h1 r180
R1: Top Overlay "COM" at -31.826,14.111 h1.5 r180; Top Overlay "NO" at -37.059,5.373 h1.5 r180; Top Overlay "NC" at -28.219,5.196 h1.5 r180
U97: Top Overlay "P0" at -13.79,-16.979 h0.8; Top Overlay "P1" at -13.79,-19.519 h0.8; Top Overlay "P2" at -13.79,-22.059 h0.8; Top Overlay "P3" at -13.79,-24.599 h0.8; Top Overlay "3.3V" at -13.79,-34.759 h0.8; Top Overlay "P6" at -13.79,-32.219 h0.8; Top Overlay "P7" at 12.33,-29.679 h0.8; Top Overlay "P8" at 12.33,-27.139 h0.8; Top Overlay "P9" at 12.33,-24.599 h0.8; Top Overlay "SYN" at 11.53,-22.059 h0.8; Top Overlay "BOOT" at 10.731,-19.519 h0.8; Top Overlay "RST" at 11.53,-16.979 h0.8; Top Overlay "P4 (SCL)" at -13.79,-27.266 h0.8; Top Overlay "P5 (SDA)" at -13.79,-29.679 h0.8; Top Overlay "VIN" at 11.664,-32.219 h0.8; Top Overlay "GND" at 11.53,-34.759 h0.8
U99: Top Overlay "+" at -19.558,-32.512 h1.52 r270; Top Overlay "-" at -36.703,-32.512 h1.52 r270
U100: Top Overlay "-" at -24.257,-42.545 h1.52 r270; Top Overlay "+" at -21.717,-42.545 h1.52 r270